# Altium PCB Module.PcbDoc (part 1 of 3)
Units mil, origin at the board's own origin, x right, y up, seen from the top; angles counter-clockwise.
Board outline 59055.12 x 27559.06 mil, 2 copper layers (Top Layer, Bottom Layer); 175 components, 152 nets, 576 pads, 116 vias.
Unrouted connection lines stored in the file: 153.
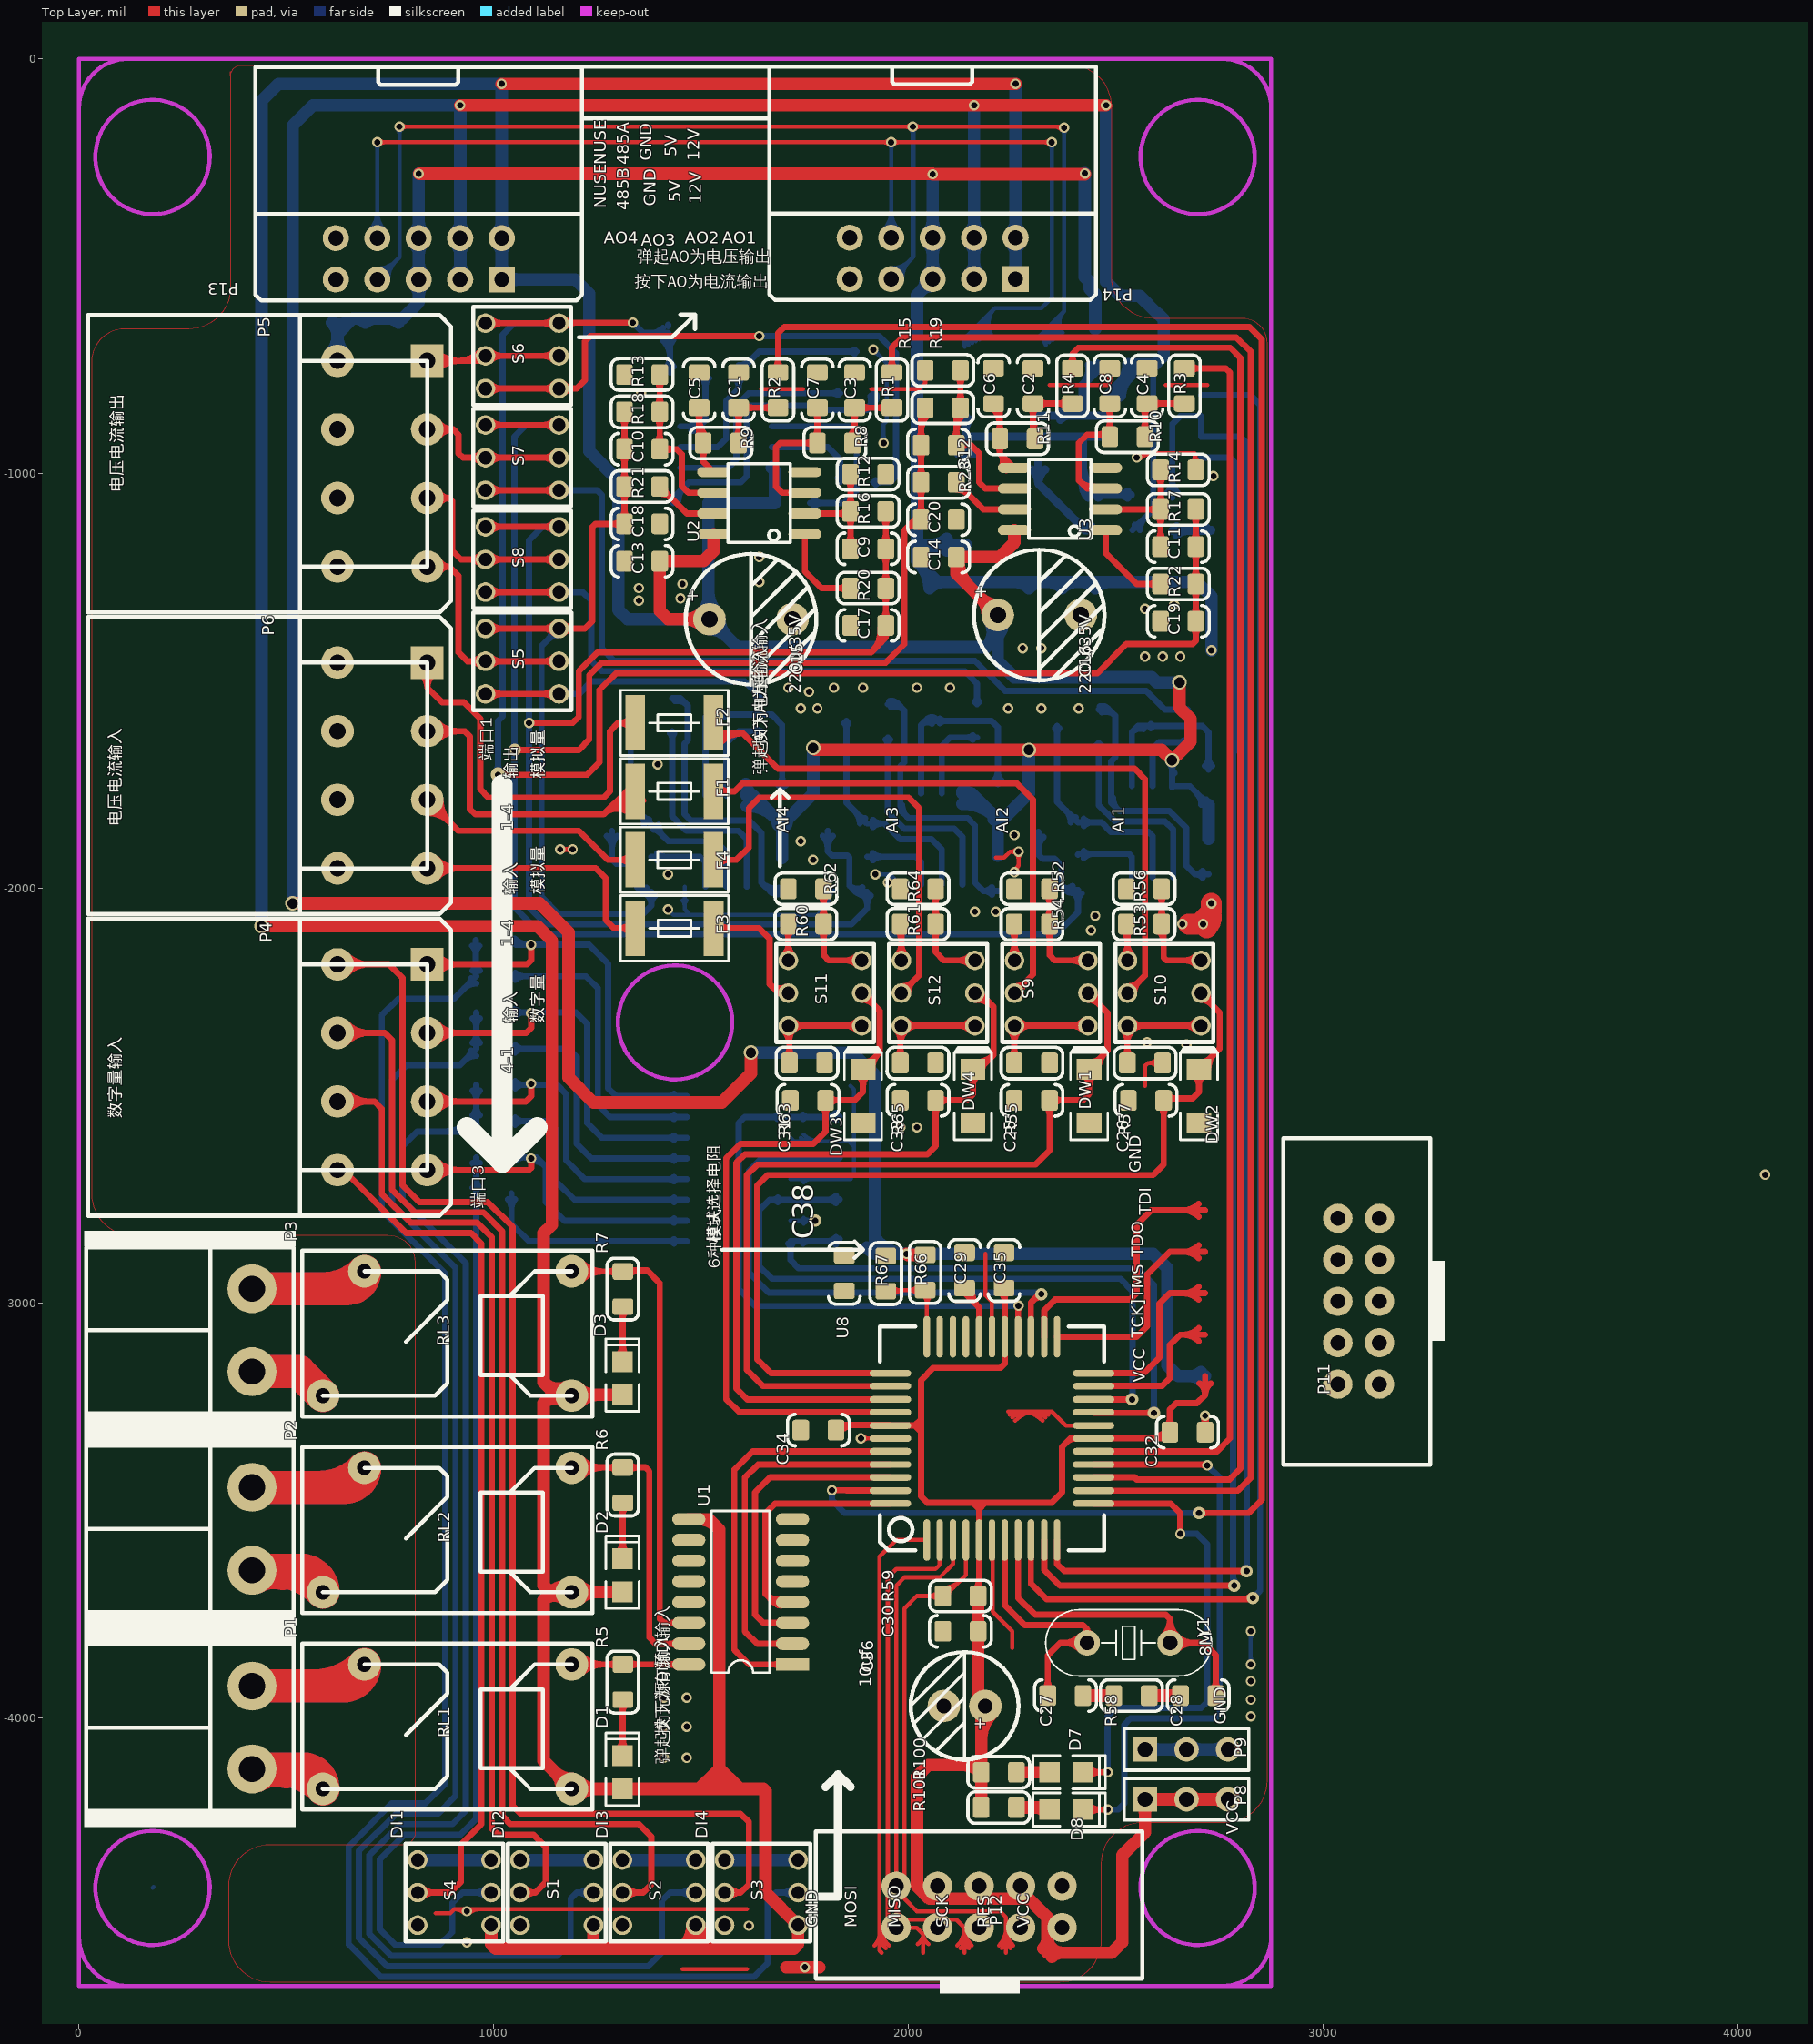
[diagram p0: Top Layer view]
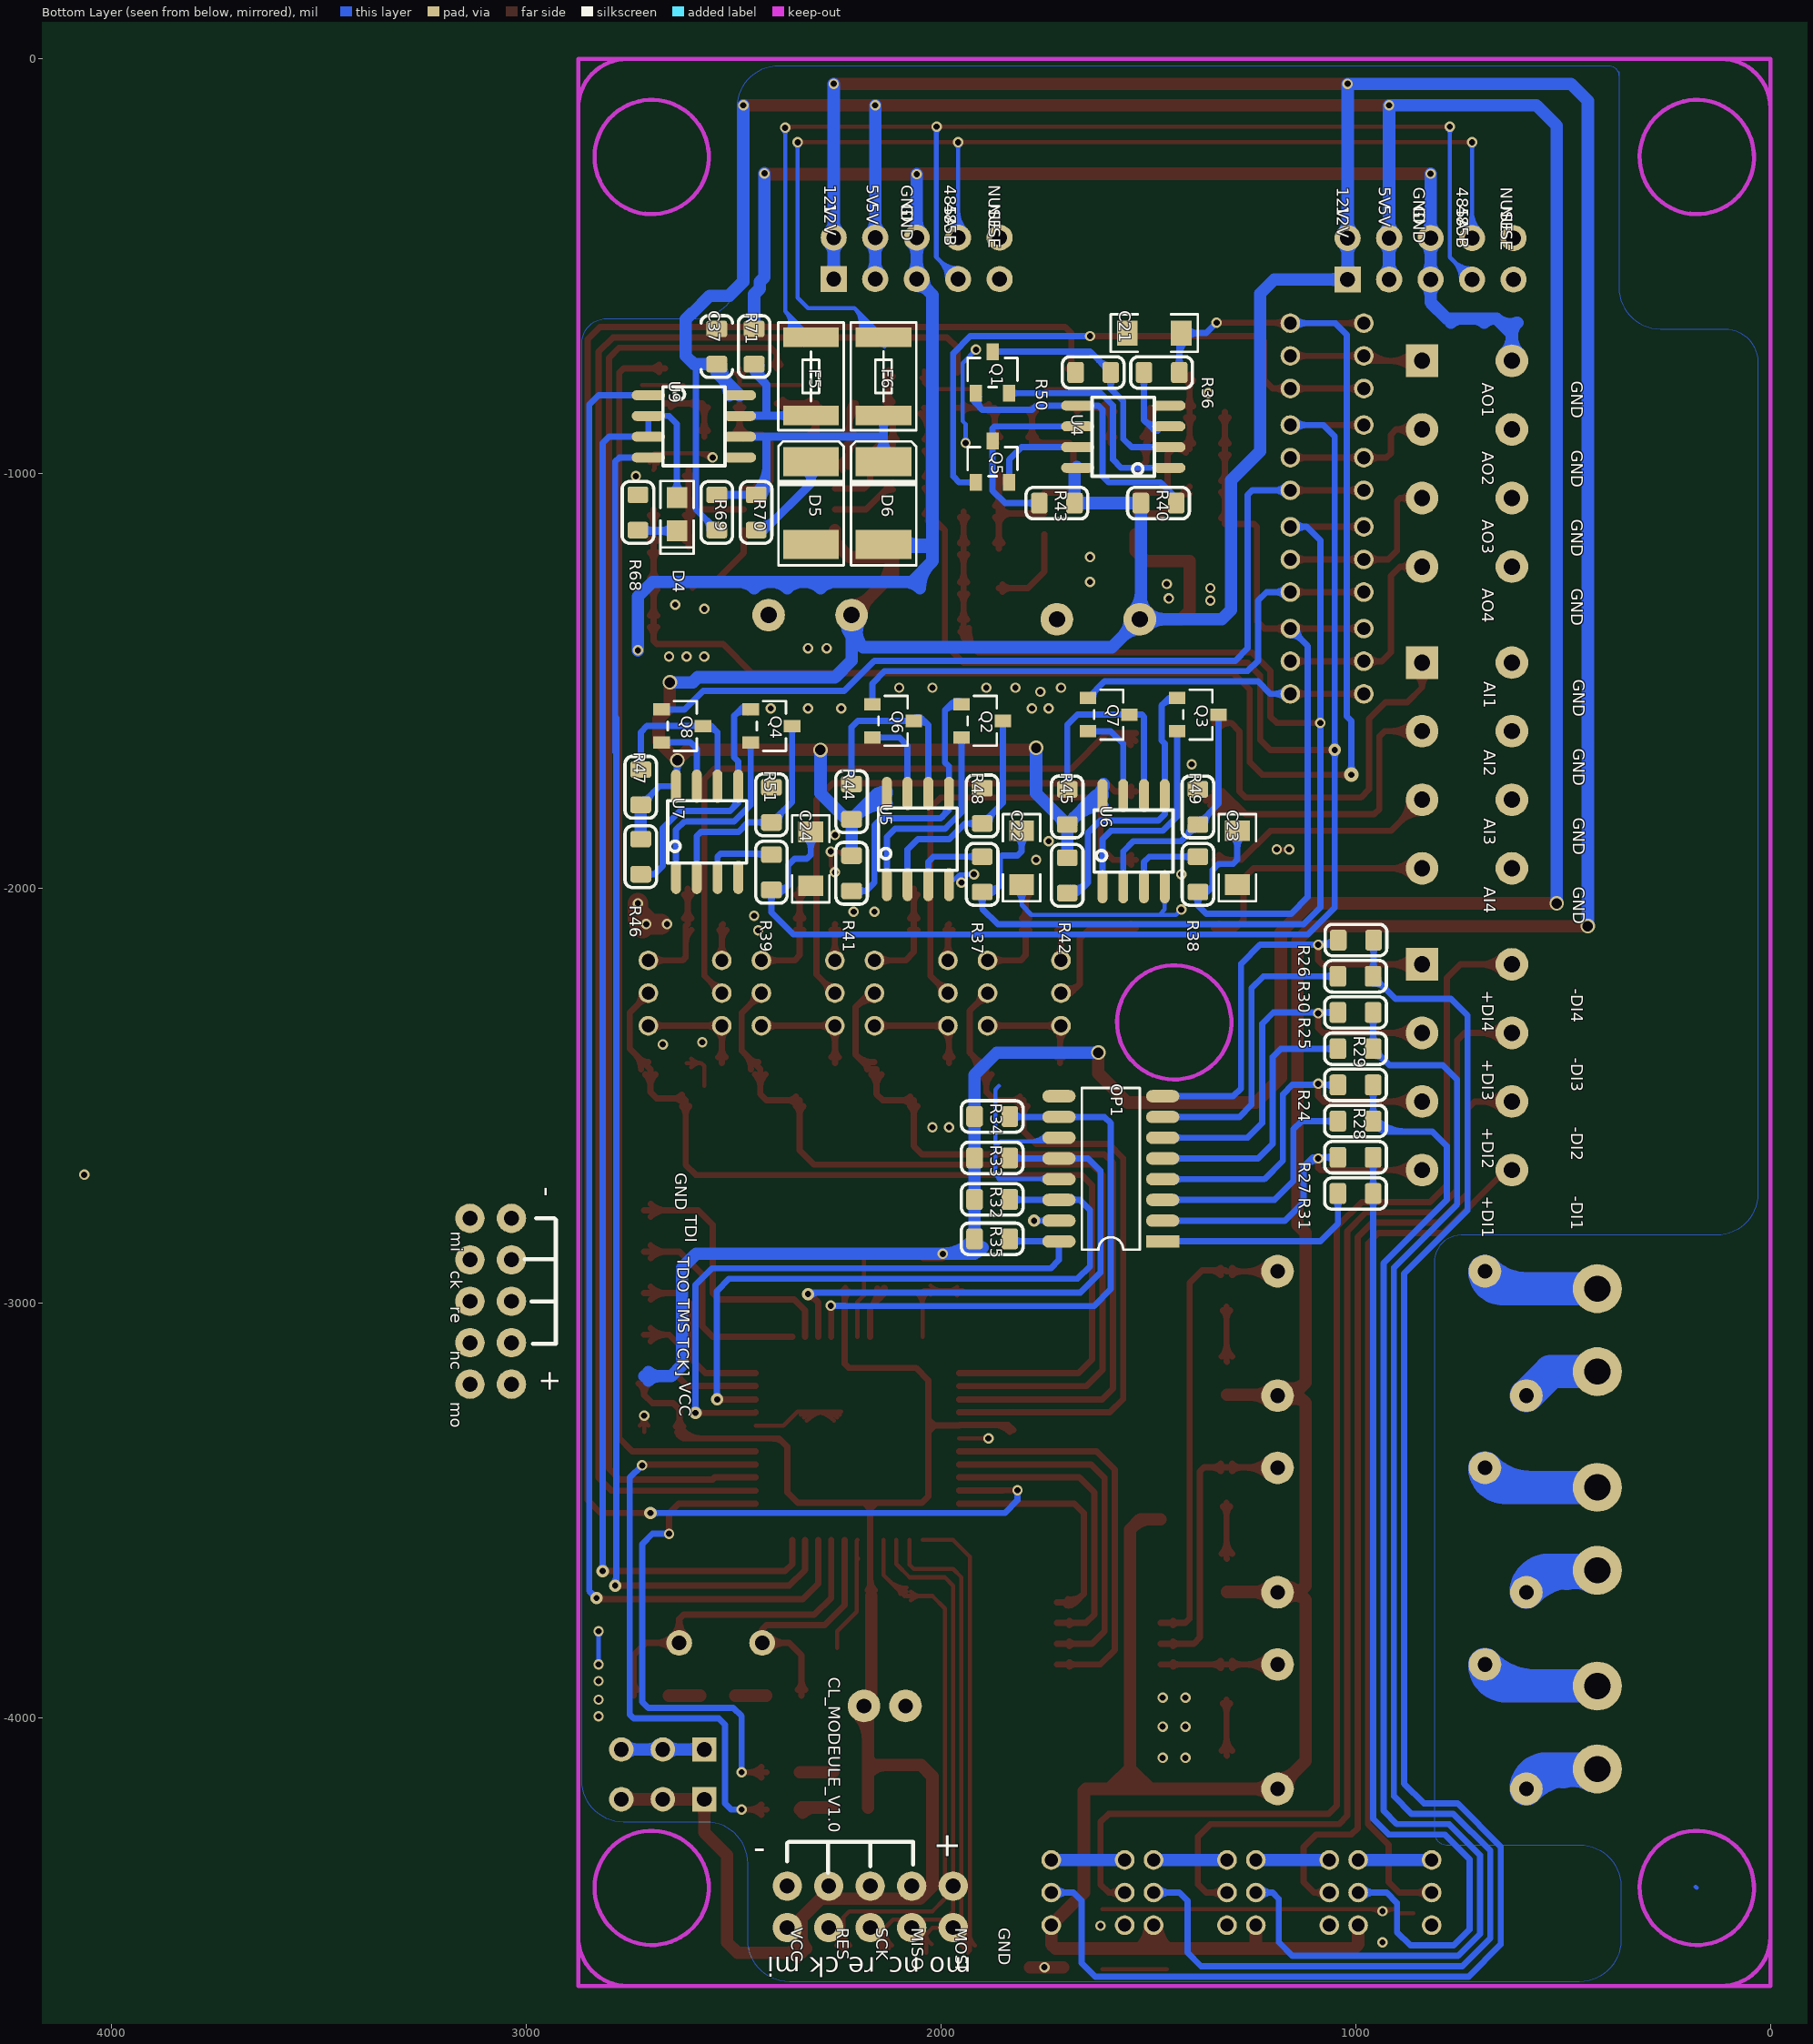
[diagram p1: Bottom Layer view, seen from below]
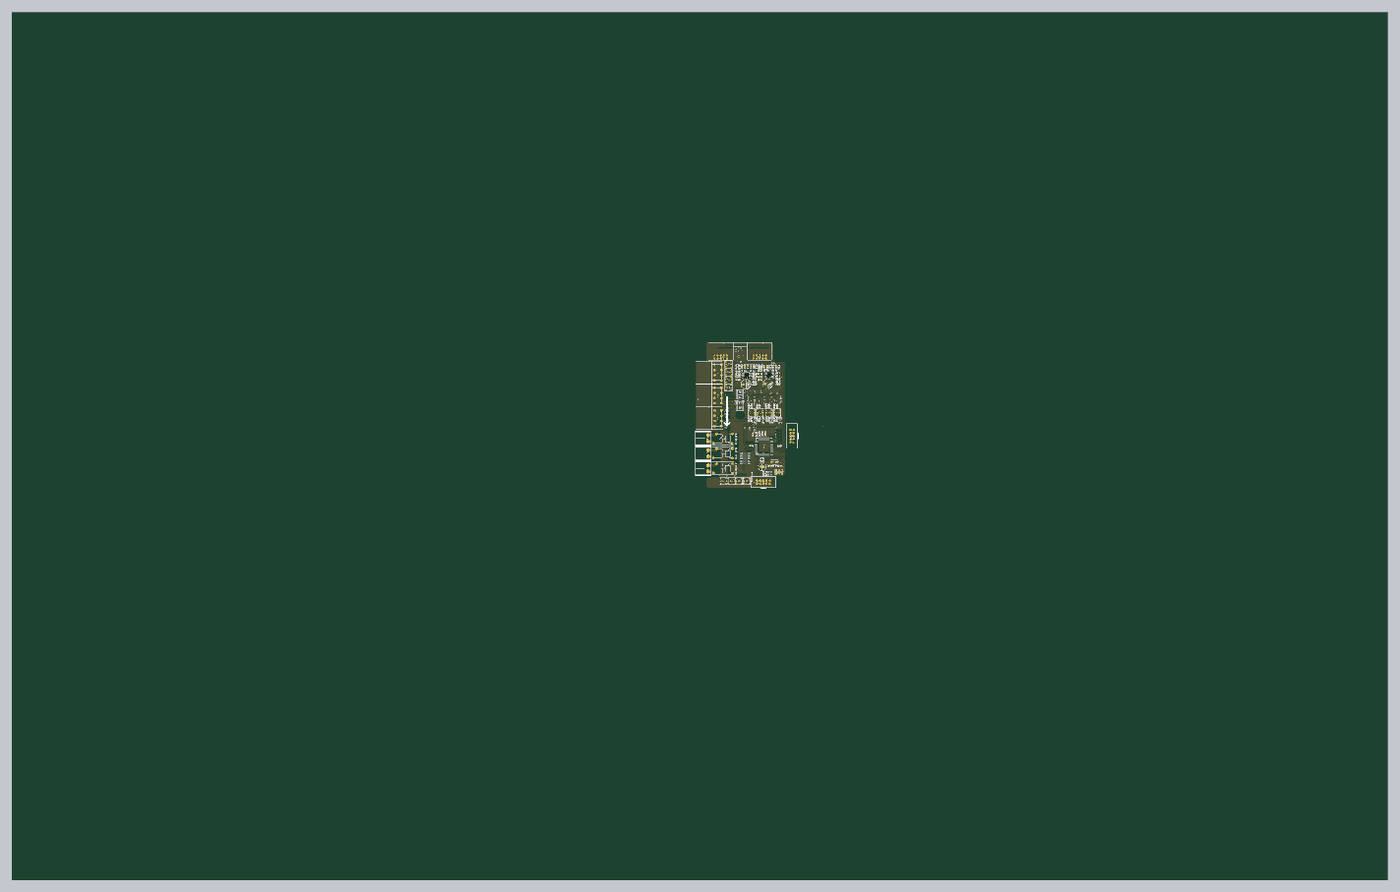
[diagram p4: 3D render of the assembled board from above, using the file's embedded part models]
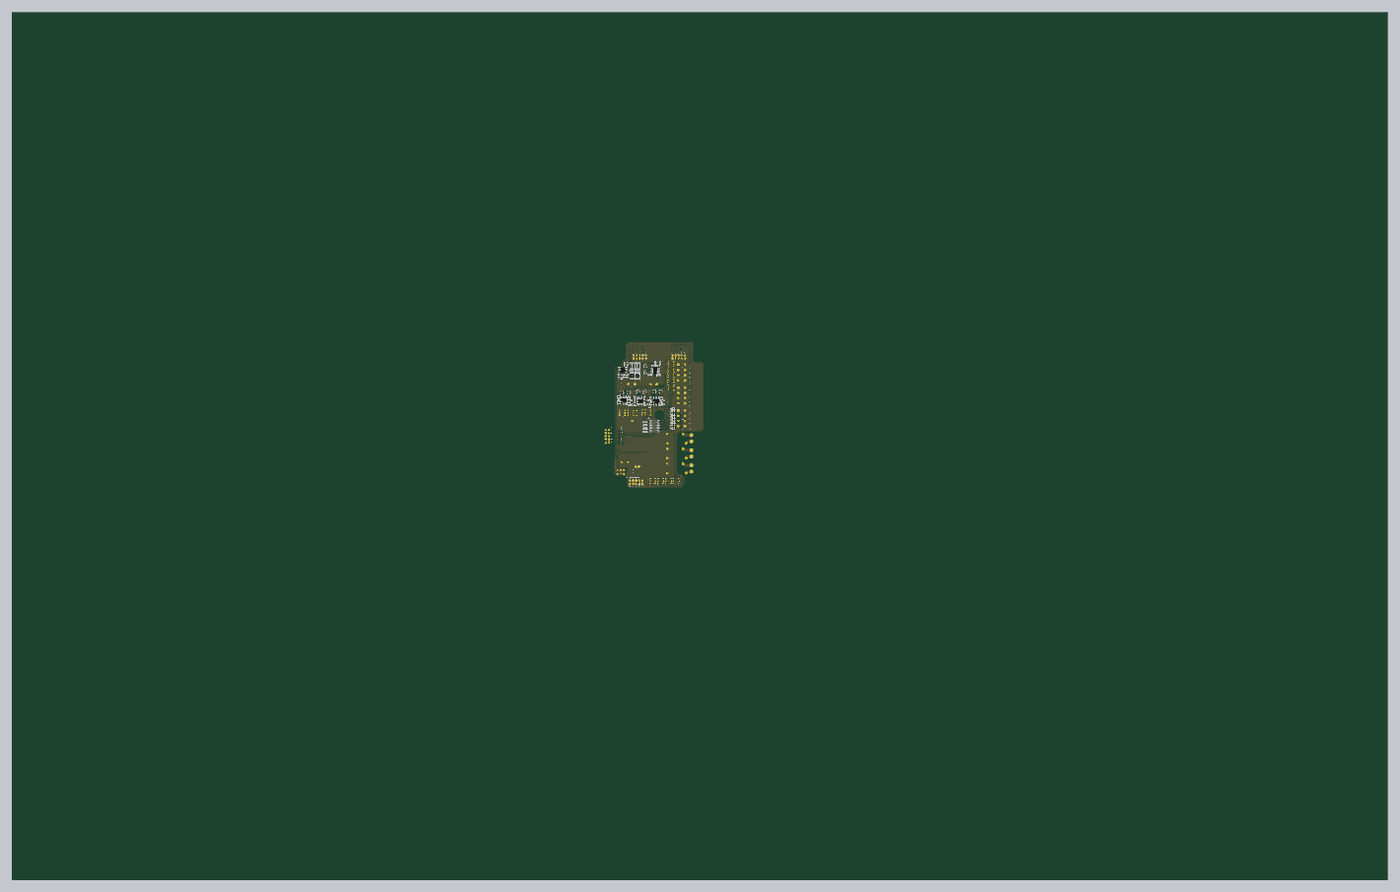
[diagram p5: 3D render of the assembled board from below, using the file's embedded part models]

## Layer stack, top to bottom
Top Solder: solder mask 0.4, Solder Resist, Dk 3.5
Top Layer: signal copper 1.4
Dielectric 1: dielectric 12.6, FR-4, Dk 4.8
Bottom Layer: signal copper 1.4
Bottom Solder: solder mask 0.4, Solder Resist, Dk 3.5

## Board outline
-21689.92,-17096.61 -21689.92,10462.44 37365.2,10462.44 37365.2,-17096.61

## Design rules (kind name [scope] priority, off if disabled: settings)
Clearance Clearance_1 [All] p1: gap=10
Clearance [All] p2: gap=20
ComponentClearance [All] p1 off: gap=10 collisioncheckmode=3 verticalgap=10 showdistances=FALSE
Height [All] p1 off: minheight=0 maxheight=1000 prefheight=500
MinimumSolderMaskSliver [All] p1 off: minsoldermaskwidth=10
PolygonConnect PolygonConnect_1 [IsVia] p1: connectstyle=Direct reliefconductorwidth=10 reliefentries=4 polygonreliefangle="90 Angle" airgapwidth=10
PolygonConnect [All] p2: connectstyle=Relief reliefconductorwidth=10 reliefentries=4 polygonreliefangle="90 Angle" airgapwidth=10
RoomDefinition Module [InComponentClass('Module')] p1 off: confinementstyle=ConfineIn formatcopy=TRUE lockcomponents=FALSE outline 460,-5395.67 -355,-5395.67 -355,-5885.67 460,-5885.67
RoutingVias [All] p1: holewidth=28 width=50 viastyle="Through Hole" minholewidth=28 minwidth=50 maxholewidth=28 maxwidth=50
SilkToBoardRegionClearance [All] p1 off:
SilkToSilkClearance [All] p1 off: silktosilkclearance=10
SilkToSolderMaskClearance [IsPad] p1 off: minsilkscreentomaskgap=10 clearancetoexposedcopper=TRUE
SolderMaskExpansion [All] p1: expansion=4
Width [All] p1: maxlimit=100 minlimit=10 preferedwidth=15 minimp=50.000000 maximp=50.000000 favimp=50.000000
23 further rules are at their usual default settings.

## Components (designator, comment, footprint, x,y, rotation, side; value= is the part's Value field where it differs from the comment)
C1 "105" C0805C 1590,-798.17 r90 top
C2 "105" C0805C 2300,-788.17 r90 top
C3 "105" C0805C 1870,-798.17 r270 top
C4 "105" C0805C 2575,-788.17 r270 top
C5 "105" C0805C 1495,-798.17 r90 top
C6 "105" C0805C 2205,-788.17 r90 top
C7 "105" C0805C 1780,-798.17 r270 top
C8 "105" C0805C 2485,-788.17 r270 top
C9 "104" C0805C 1902.5,-1180.67 r0 top
C10 "104" C0805C 1357.5,-940.67 r180 top
C11 "104" C0805C 2650.1,-1175.67 r0 top
C12 "104" C0805C 2072.5,-930.67 r180 top
C13 "104" C0805C 1357.5,-1210.67 r0 top
C14 "104" C0805C 2072.5,-1200.67 r0 top
C15 "220u/35V" E8MM 1620,-1350.67 r0 top
C16 "220u/35V" E8MM 2315,-1340.67 r0 top
C17 "105" C0805C 1902.5,-1365.67 r180 top
C18 "105" C0805C 1357.5,-1120.67 r0 top
C19 "105" C0805C 2650.1,-1355.67 r180 top
C20 "105" C0805C 2072.5,-1110.67 r0 top
C21 "10u/16V" 1206 1485,-660.67 r0 bottom
C22 "10u/16V" 1206 1805,-1925.67 r270 bottom
C23 "10u/16V" 1206 1285,-1925.67 r270 bottom
C24 "10u/16V" 1206 2313.21,-1928.17 r270 bottom
C25 "104" C0805C 2297.5,-2510.67 r180 top
C26 "104" C0805C 2572.5,-2510.67 r180 top
C27 "22p" C0805C 2378,-3945.67 r0 top
C28 "22p" C0805C 2698,-3945.76 r180 top
C29 "104" C0805C 2135,-2920.67 r270 top
C30 "104" C0805C 2125,-3790.67 r0 top
C31 "104" C0805C 1757.5,-2510.67 r180 top
C32 "104" C0805C 2672.5,-3310.67 r180 top
C33 "104" C0805C 2022.5,-2510.67 r180 top
C34 "104" C0805C 1782.5,-3305.67 r0 top
C35 "104" C0805C 2230,-2920.67 r90 top
C36 "10uf" E6.5MM 2185,-3970.67 r180 top
C37 "104" C0805C 2540,-693.17 r90 bottom
C38 "104" C0805C 1845,-2927.5 r90 top
D1 "LED0" LED0805 1310,-4170.67 r270 top
D2 "LED0" LED0805 1310,-3695.67 r270 top
D3 "LED0" LED0805 1310,-3220.67 r270 top
D4 "LED" LED0805 2636,-1057.56 r90 bottom
D5 "SMBJ6.8" SMBJ_SMT 2312.9,-1070.67 r90 bottom
D6 "SMBJ6.8" SMBJ_SMT 2137.9,-1070.67 r90 bottom
D7 "LED" LED0805 2340,-4130.67 r180 top
D8 "LED" LED0805 2340,-4220.67 r180 top
DW1 "5.1V" 1206AK 2435,-2500.67 r90 top
DW2 "5.1V" 1206AK 2700,-2500.67 r90 top
DW3 "5.1V" 1206AK 1890,-2500.67 r90 top
DW4 "5.1V" 1206AK 2155,-2500.67 r90 top
F1 "X14" PPTC_SMT 1435,-1765.67 r0 top
F2 "X14" PPTC_SMT 1435,-1600.67 r0 top
F3 "X14" PPTC_SMT 1435.51,-2095.67 r0 top
F4 "X14" PPTC_SMT 1435,-1930.67 r0 top
F5 "X14" PPTC_SMT 2312.9,-765.11 r270 bottom
F6 "X14" PPTC_SMT 2137.9,-765.11 r270 bottom
OP1 "PS2512-4" SO_16 1590,-2675.67 r90 bottom
P1 "DO" PL2Q 417,-4022.67 r270 top locked
P2 "DO" PL2Q 417,-3543.67 r270 top locked
P3 "DO" PL2Q 417,-3064.67 r270 top locked
P4 "DI输入" "8P _COM" 731.27,-2430.64 r270 top locked
P5 "电压电流转换" "8P _COM" 731.27,-975.7 r270 top locked
P6 "AI输入" "8P _COM" 731.27,-1703.17 r270 top locked
P8 "GND" HDR1X3 2570,-4195.67 r0 top
P9 "VCC" HDR1X3 2570,-4075.67 r0 top
P11 "JTAG" FC10 3085,-2995 r270 top
P12 "ISP" FC10 2170,-4455 r180 top
P13 "Header 10H" FC10P_WAN 819,-481.67 r180 top locked
P14 "Header 10H" FC10P_WAN 2058,-480.67 r180 top
Q1 "NPN" SOT_23 1875,-755.67 r180 bottom
Q2 "NPN" SOT_23 1900,-1595.67 r270 bottom
Q3 "NPN" SOT_23 1380,-1580.67 r270 bottom
Q4 "NPN" SOT_23 2408.21,-1608.17 r270 bottom
Q5 "PNP" SOT_23 1875,-970.67 r180 bottom
Q6 "PNP" SOT_23 2115,-1595.67 r270 bottom
Q7 "PNP" SOT_23 1595,-1580.67 r270 bottom
Q8 "PNP" SOT_23 2623.21,-1608.17 r270 bottom
R1 "100K" 0805R 1960,-798.17 r90 top
R2 "100K" 0805R 1685,-798.17 r90 top
R3 "100K" 0805R 2665,-788.17 r90 top
R4 "100K" 0805R 2395,-788.17 r90 top
R5 "1K" 0805R 1311,-3913.17 r90 top
R6 "1K" 0805R 1311,-3438.17 r90 top
R7 "1K" 0805R 1311,-2965.67 r90 top
R8 "100K" 0805R 1822.5,-925.67 r0 top
R9 "100K" 0805R 1547.5,-925.67 r0 top
R10 "100K" 0805R 2527.5,-910.67 r0 top
R11 "100K" 0805R 2262.5,-915.67 r0 top
R12 "10K" 0805R 1902.5,-1000.67 r0 top
R13 "10K" 0805R 1357.5,-760.67 r180 top
R14 "10K" 0805R 2650.1,-990.67 r0 top
R15 "10K" 0805R 2082.5,-750.67 r180 top
R16 "10K" 0805R 1902.5,-1090.67 r180 top
R17 "10K" 0805R 2650,-1085.67 r180 top
R18 "10K" 0805R 1357.5,-850.67 r0 top
R19 "10K" 0805R 2082.5,-840.67 r0 top
R20 "100R" 0805R 1902.5,-1275.67 r180 top
R21 "100R" 0805R 1357.5,-1030.67 r0 top
R22 "100R" 0805R 2650,-1265.67 r180 top
R23 "100R" 0805R 2072.5,-1020.67 r0 top
R24 "10K" 0805R 1000,-2473.38 r0 bottom
R25 "10K" 0805R 1000,-2298.81 r0 bottom
R26 "10K" 0805R 999,-2124.24 r0 bottom
R27 "10K" 0805R 1000,-2647.96 r0 bottom
R28 "10K" 0805R 1000,-2560.67 r0 bottom
R29 "10K" 0805R 1000,-2386.1 r0 bottom
R30 "10K" 0805R 1000,-2211.52 r0 bottom
R31 "10K" 0805R 1000,-2735.24 r0 bottom
R32 "10K" 0805R 1876.04,-2749.58 r0 bottom
R33 "10K" 0805R 1876.04,-2649.58 r0 bottom
R34 "10K" 0805R 1876.04,-2549.58 r0 bottom
R35 "10K" 0805R 1876.04,-2844.58 r0 bottom
R36 "200k" 0805R 1467.5,-755.67 r180 bottom
R37 "200k" 0805R 1900,-1965.67 r270 bottom
R38 "200k" 0805R 1380,-1965.67 r270 bottom
R39 "200k" 0805R 2408.21,-1960.67 r270 bottom
R40 "1.5K" 0805R 1475,-1070.67 r0 bottom
R41 "1.5K" 0805R 2215,-1963.17 r90 bottom
R42 "1.5K" 0805R 1695,-1968.17 r90 bottom
R43 "150R" 0805R 1720,-1070.67 r180 bottom
R44 "150R" 0805R 2215,-1790.67 r270 bottom
R45 "150R" 0805R 1695,-1803.17 r270 bottom
R46 "1.5K" 0805R 2723.21,-1923.17 r90 bottom
R47 "150R" 0805R 2723.21,-1755.67 r270 bottom
R48 "1K" 0805R 1900,-1800.67 r270 bottom
R49 "1K" 0805R 1380,-1803.17 r270 bottom
R50 "1K" 0805R 1632.5,-755.67 r180 bottom
R51 "1K" 0805R 2408.21,-1798.17 r270 bottom
R52 "10K" 0805R 2297.5,-2085.67 r0 top
R53 "10K" 0805R 2567.5,-2085.67 r0 top
R54 "10K" 0805R 2297.5,-2000.67 r180 top
R55 "250R" 0805R 2297.5,-2420.67 r0 top
R56 "10K" 0805R 2567.5,-2000.67 r180 top
R57 "250R" 0805R 2570,-2420.67 r0 top
R58 "1M" 0805R 2537.5,-3945.67 r0 top
R59 "10K" 0805R 2125,-3705.67 r0 top
R60 "10K" 0805R 1752.5,-2085.67 r0 top
R61 "10K" 0805R 2022.5,-2085.67 r0 top
R62 "10K" 0805R 1752.5,-2000.67 r180 top
R63 "250R" 0805R 1755,-2420.67 r0 top
R64 "10K" 0805R 2022.5,-2000.67 r180 top
R65 "250R" 0805R 2022.5,-2420.67 r0 top
R66 "10K" 0805R 2040,-2925.67 r90 top
R67 "???" 0805R 1945,-2928.17 r270 top
R68 "1K" 0805R 2730,-1093.17 r270 bottom
R69 "3K" 0805R 2540,-1093.17 r270 bottom
R70 "120R?" 0805R 2445,-1093.17 r270 bottom
R71 "3K" 0805R 2450,-693.17 r270 bottom
R100 "1K" 0805R 2217.5,-4130.67 r0 top
R101 "1K" 0805R 2217.5,-4215.67 r0 top
RL1 "" HF32A4 888,-4020.67 r180 top locked
RL2 "" HF32A4 888,-3546.67 r180 top locked
RL3 "" HF32A4 888,-3072.67 r180 top locked
S1 "SW-DPDT" BUTTON 1151.67,-4420.67 r0 top
S2 "SW-DPDT" BUTTON 1398.33,-4420.67 r0 top
S3 "SW-DPDT" BUTTON 1645,-4420.67 r0 top
S4 "SW-DPDT" BUTTON 905,-4420.67 r0 top
S5 "SW-DPDT" BUTTON 1068.58,-1451.93 r180 top
S6 "SW-DPDT" BUTTON 1068.58,-715.67 r180 top
S7 "SW-DPDT" BUTTON 1068.58,-961.09 r180 top
S8 "SW-DPDT" BUTTON 1068.58,-1206.51 r180 top
S9 "SW-DPDT" button 2343.81,-2251.93 r0 top
S10 "SW-DPDT" BUTTON 2616.42,-2251.93 r0 top
S11 "SW-DPDT" BUTTON 1798.58,-2251.93 r0 top
S12 "SW-DPDT" BUTTON 2071.19,-2251.93 r0 top
U1 "2003" SO_16 1595,-3695.67 r90 top
U2 "LM358" SOP-08 1640,-1070.67 r90 top
U3 "LM358" SOP-08 2365,-1060.67 r90 top
U4 "LM358" SOP-08 1560,-910.67 r90 bottom
U5 "LM358" SOP-08 2055,-1880.67 r180 bottom
U6 "LM358" SOP-08 1535,-1885.67 r180 bottom
U7 "LM358" SOP-08 2563.21,-1863.17 r180 bottom
U8 "Atmega16" QFP44 2201,-3325.67 r90 top
U9 "U485" SOP8 2595,-885.67 r270 bottom
Y1 "8M" XTAL-M 2630.5,-3818.67 r180 top

## Footprints (in the part's own frame and the unit in brackets; to place one, negate y for a bottom-side part, rotate by r counter-clockwise, add the part's x,y. Pads: shape width x height; smd on the part's side, far side on the other; paste and mask are expansions set on the pad)
"8P _COM" [mm]
  rect 2x2 hole 1: 1(-6.3,2.75)
  round 2 hole 1: 2(-6.3,-2.75) 3(-2.1,2.75) 4(-2.1,-2.75) 5(2.1,2.75) 6(2.1,-2.75) 7(6.3,2.75) 8(6.3,-2.75)
  silkscreen extent -9.1,-18.04 9.1,4.2
0805R [mil]
  rrect30% 40x50 smd: 1(-42.5,0) 2(42.5,0)
  silkscreen extent -75,-38 75,38, body extent -39,-25 40,25, height 30
1206 [mil]
  rect 50x60 smd: 1(-65,0) 2(65,0)
  silkscreen extent -105,-45 105,45
1206AK [mil]
  rect 50x60 smd: A(-65,0) K(65,0)
  silkscreen extent -105,-45 118,45
BUTTON [mm]
  round 1.2 hole 0.8: 1(-2.25,0) 2(-2.25,2) 3(-2.25,-2) 4(2.25,0) 5(2.25,2) 6(2.25,-2)
  silkscreen extent -3,-3 3,3
button [mm]
  round 1.2 hole 0.8: 1(-2.25,0) 2(-2.25,2) 3(-2.25,-2) 4(2.25,0) 5(2.25,2) 6(2.25,-2)
  silkscreen extent -3,-3 3,3
C0805C [mil]
  rrect30% 40x50 smd: 1(-42.5,0) 2(42.5,0)
  silkscreen extent -75,-38 75,38, body extent -39,-25 39,25, height 30
E6.5MM [mm]
  round 2 hole 0.9: 1(0,0) 2(2.54,0)
  silkscreen extent -2.03,-3.3 4.57,3.3
E8MM [mm]
  round 2 hole 1: 1(-2.54,0) 2(2.54,0)
  silkscreen extent -4,-4 4,4, body extent -4.01,-4.04 4.01,3.99, height 7
FC10 [mm]
  round 1.8 hole 0.914: 1(5.08,1.27) 2(5.08,-1.27) 3(2.54,1.27) 4(2.54,-1.27) 5(0,1.27) 6(0,-1.27) 7(-2.54,1.27) 8(-2.54,-1.27) 9(-5.08,1.27) 10(-5.08,-1.27)
  silkscreen extent -10,-4.61 10,5.32
FC10P_WAN [mm]
  rect 1.6x1.6 hole 0.914: 1(-5.08,1.27)
  round 1.6 hole 0.914: 2(-5.08,-1.27) 3(-2.54,1.27) 4(-2.54,-1.27) 5(0,1.27) 6(0,-1.27) 7(2.54,1.27) 8(2.54,-1.27) 9(5.08,1.27) 10(5.08,-1.27)
  silkscreen extent -10,-11.75 10,2.55
HDR1X3 [mm] "Connector; Header; 3 Position"
  rect 1.5x1.5 hole 0.9: 1(0,0)
  round 1.5 hole 0.9: 2(2.54,0) 3(5.08,0)
  silkscreen extent -1.27,-1.27 6.35,1.27
HF32A4 [mm]
  round 2 hole 0.9: 1(-7.62,3.81) 2(-7.62,-3.81) 3(7.62,3.81) 4(5.08,-3.81)
  silkscreen extent -8.89,-5.08 8.89,5.08
LED0805 [mil]
  rect 50x50 smd: 1(0,0) 2(-80,0)
  silkscreen extent -135,-40 40,40
PL2Q [mm]
  round 3 hole 1.6: 1(-2.54,0) 2(2.54,0)
  silkscreen extent -6.1,-10.29 6.1,2.67
PPTC_SMT [mm]
  rect 1.2x3.4 smd: 1(-2.4,0) 2(2.4,0)
  silkscreen extent -3.3,-2 3.3,2, body extent -2.36,-2.08 2.62,2.08, height 0.5
QFP44 [mil]
  oval 100x16 smd: 1(-245,157) 2(-245,126) 3(-245,94) 4(-245,63) 5(-245,31) 6(-245,0) 7(-245,-31) 8(-245,-63) 9(-245,-94) 10(-245,-126) 11(-245,-157) 23(245,-157) 24(245,-126) 25(245,-94) 26(245,-63) 27(245,-31) 28(245,0) 29(245,31) 30(245,63) 31(245,94) 32(245,126) 33(245,157)
  oval 16x100 smd: 12(-157,-245) 13(-126,-245) 14(-94,-245) 15(-63,-245) 16(-31,-245) 17(0,-245) 18(31,-245) 19(63,-245) 20(94,-245) 21(126,-245) 22(157,-245) 34(157,245) 35(126,245) 36(94,245) 37(63,245) 38(31,245) 39(0,245) 40(-31,245) 41(-63,245) 42(-94,245) 43(-126,245) 44(-157,245)
  silkscreen extent -270,-270 270,270
SMBJ_SMT [mil]
  rect 70x133.86 smd: A(-100,0) K(100,0)
  silkscreen extent -150,-79 149,79, body extent -91,-53 91,53, height 94
SO_16 [mil]
  rect 30x80 smd: 1(-175,-125)
  oval 30x80 smd: 2(-125,-125) 3(-75,-125) 4(-25,-125) 5(25,-125) 6(75,-125) 7(125,-125) 8(175,-125) 9(175,125) 10(125,125) 11(75,125) 12(25,125) 13(-25,125) 14(-75,125) 15(-125,125) 16(-175,125)
  silkscreen extent -195,-70 195,70, body extent -194,-115 192,113, height 69
SOP8 [mil]
  oval 24x80 smd: 1(-75,-110) 2(-25,-110) 3(25,-110) 4(75,-110) 5(75,110) 6(25,110) 7(-25,110) 8(-75,110)
  silkscreen extent -95,-75 95,75, body extent -97,-118 96,118, height 61
SOP-08 [mil]
  oval 24x80 smd: 1(-75,-110) 2(-25,-110) 3(25,-110) 4(75,-110) 5(75,110) 6(25,110) 7(-25,110) 8(-75,110)
  silkscreen extent -95,-75 95,75, body extent -97,-118 96,118, height 61
SOT_23 [mil]
  rect 30x40 smd: 1(-40,-50) 2(40,-50) 3(0,50)
  silkscreen extent -60,-35 60,35
XTAL-M [mil]
  round 62 hole 35.43: 1(0,0) 2(200,0)
  silkscreen extent -100,-80 300,80

## Part data
C1 C2 C5 C6 C9 C10 C11 C12 C13 C14 C17 C18 C19 C20 C21 C22 C23 C24 C25 C26 C31 C33 C37 C38: library part CAP, "Capacitor"
C3 C4 C7 C8 C27 C28 C29 C30 C32 C34 C35: library part Cap, "Capacitor"
C15 C16: library part ELECTRO1, "Electrolytic Capacitor"
C36: library part "Cap Pol1", "Polarized Capacitor (Radial)"
D1 D2 D3: "Typical INFRARED GaAs LED"
D5 D6 DW1 DW2 DW3 DW4: library part DIODE, "Diode"
F1 F2 F3 F4 F5 F6: library part "Fuse 1", "Fuse"
P1 P2 P3: library part "Header 2", "Header, 2-Pin"
P4 P5 P6: library part "Header 8", "Header, 8-Pin"
P8 P9: library part "Header 3", "Header, 3-Pin"
P11 P12: library part "Header 10H", "Header, 10-Pin, Right Angle"
P13 P14: "Header, 10-Pin, Right Angle"
Q1 Q2 Q3 Q4: "NPN Bipolar Transistor"
Q5 Q6 Q7 Q8: "PNP Bipolar Transistor"
R1 R2 R3 R4 R5 R6 R7 R8 R9 R10 R11 R12 R13 R14 R15 R16 R17 R18 R19 R20 R21 R22 R23 R24 R25 R26 R27 R28 R29 R30 R31 R36 R37 R38 R39 R40 R41 R42 R43 R44 R45 R46 R47 R48 R49 R50 R51 R52 R53 R54 R55 R56 R57 R58 R59 R60 R61 R62 R63 R64 R65 R66 R67 R69 R70 R71 R100 R101: library part Res2, "Resistor"
R32 R33 R34 R35 R68: library part res
RL1 RL2 RL3: library part RELAY
S1 S2 S3 S4 S5 S6 S7 S8 S9 S10 S11 S12: "Double-Pole, Double-Throw Switch"
U1: library part ULN2003A, "High-Voltage, High-Current Darlington Array"
Y1: library part XTAL, "Crystal Oscillator"

## Via types
v1: diameter 25, hole 15, Top Layer to Bottom Layer, tented both sides, 99 vias
v2: diameter 30, hole 15, Top Layer to Bottom Layer, tented both sides, 9 vias
v3: diameter 35, hole 25, Top Layer to Bottom Layer, tented both sides, 7 vias
v4: diameter 35, hole 15, Top Layer to Bottom Layer, tented both sides, 1 vias

## Nets (pads, with @x,y where several pads share a name; then routed paths per layer and width w, separated by ;. In a path a pad name is that pad's centre, name@x,y a point inside that pad or via, vN(x,y) a via of type N, cw(c..) or ccw(c..) an arc to the next point about the centre after c; other vN are vias at no path point)
0~10V(1): C11.2 C19.1 C21.1 R17.1 R22.1 R36.2 S6.3 S6.6 | length 4836
  Top Layer w15: S6.6@980,-636.93 S6.3@1157.16,-636.93 1158.42,-635.67 v1(1335,-635.67) ; S6.6@991.4,-648.33 cw(c1018.92,-675.85) 1018.92,-636.93 cw(c1018.92,-598.01) S6.6@991.4,-625.53 ; v4(1010,-1725.67) 1225,-1725.67 1255,-1695.67 1255,-1520.67 1295,-1480.67 2455,-1480.67 2525,-1410.67 2684.9,-1410.67 2692.6,-1402.96 C19.1@2692.6,-1355.67 2692.5,-1355.57 R22.1@2692.5,-1265.67 2692.6,-1265.57 C11.2@2692.6,-1175.67 2692.5,-1175.57 R17.1@2692.5,-1085.67 ; v4@1017.07,-1732.74 cw(c1034.14,-1749.81) 1034.14,-1725.67 cw(c1034.14,-1701.53) v4@1017.07,-1718.6 ; S6.3@1145.76,-648.33 ccw(c1118.24,-675.85) 1118.24,-636.93 ccw(c1118.24,-598.01) S6.3@1145.76,-625.53 ; S6.3@1168.56,-648.33 cw(c1199.13,-678.89) 1199.13,-635.67 ; S6.3@1168.56,-625.53 ccw(c1193.04,-601.05) 1193.04,-635.67 ; R22.1@2683.66,-1279.51 cw(c2662.32,-1300.85) 2692.5,-1300.85 cw(c2722.68,-1300.85) R22.1@2701.34,-1279.51 ; R22.1@2683.66,-1251.83 ccw(c2662.07,-1230.24) 2692.6,-1230.24 ; R17.1@2683.66,-1099.51 cw(c2662.32,-1120.85) 2692.5,-1120.85 cw(c2722.68,-1120.85) R17.1@2701.34,-1099.51 ; C19.1@2683.77,-1369.51 cw(c2662.43,-1390.85) 2692.6,-1390.85 cw(c2722.78,-1390.85) C19.1@2701.44,-1369.51 ; C19.1@2683.77,-1341.83 ccw(c2662.68,-1320.74) 2692.5,-1320.74 ; C11.2@2683.77,-1189.51 cw(c2662.43,-1210.85) 2692.6,-1210.85 cw(c2722.78,-1210.85) C11.2@2701.44,-1189.51 ; C11.2@2683.77,-1161.83 ccw(c2662.68,-1140.74) 2692.5,-1140.74 ; 2692.5,-1320.24 ccw(c2723.03,-1320.24) C19.1@2701.44,-1341.83 ; 2692.5,-1140.24 ccw(c2723.03,-1140.24) C11.2@2701.44,-1161.83 ; 2692.6,-1230.74 ccw(c2722.43,-1230.74) R22.1@2701.34,-1251.83
  Bottom Layer w15: v4@1002.93,-1718.6 ccw(c985.86,-1701.53) 1010,-1701.53 ccw(c1034.14,-1701.53) v4@1017.07,-1718.6 ; v4(1010,-1725.67) 1010,-1595.67 1021.12,-1584.55 1021.12,-664.55 1048.74,-636.93 S6.3@1157.16,-636.93 ; S6.3@1145.76,-648.33 ccw(c1118.24,-675.85) 1118.24,-636.93 ccw(c1118.24,-598.01) S6.3@1145.76,-625.53 ; v1(1335,-635.67) 1360,-660.67 C21.1@1412.5,-660.67 ; C21.1@1407.63,-678.04 cw(c1365.68,-719.99) 1425,-719.99 ; C21.1@1407.63,-673.04 ccw(c1377.75,-702.92) 1377.75,-660.67 ccw(c1377.75,-618.42) C21.1@1407.63,-648.3 ; R36.2@1416.16,-741.83 ccw(c1394.82,-720.49) 1425,-720.49 ccw(c1455.18,-720.49) R36.2@1433.84,-741.83 ; C21.1@1420,-660.67 C21.1@1412.5,-660.67 ; C21.1@1420,-643.85 C21.1@1420,-640.67 ; R36.2@1425,-755.67 1425,-682.49 1412.5,-669.99 C21.1@1412.5,-660.67 ; 1425,-695.85 cw(c1450.18,-695.85) C21.1@1432.37,-678.04
0~10V(2): C12.2 C20.1 C24.1 R19.1 R23.1 R39.2 S7.3 S7.6 | length 5691.1
  Top Layer w15: S7.6@980,-882.35 S7.3@1157.17,-882.35 ; S7.6@991.4,-893.75 cw(c1018.92,-921.27) 1018.92,-882.35 cw(c1018.92,-843.43) S7.6@991.4,-870.95 ; v2(1050,-1665.67) 1205,-1665.67 1230,-1640.67 1230,-1486.03 1260.36,-1455.67 1945,-1455.67 1990,-1410.67 1990,-1135.67 ; v2@1055.3,-1670.97 cw(c1068.11,-1683.78) 1068.11,-1665.67 cw(c1068.11,-1647.56) v2@1055.3,-1660.37 ; S7.3@1145.77,-893.75 ccw(c1118.24,-921.27) 1118.24,-882.35 ccw(c1118.24,-843.43) S7.3@1145.77,-870.95 ; 2006.89,-1118.78 cw(c2023.21,-1135.1) C20.1@2030.82,-1113.31 ; C20.1@2021.16,-1096.83 ccw(c1999.82,-1075.49) 2030,-1075.49 ccw(c2060.18,-1075.49) C20.1@2038.84,-1096.83 ; R23.1@2021.16,-1034.51 cw(c1999.82,-1055.85) 2030,-1055.85 cw(c2060.18,-1055.85) R23.1@2038.84,-1034.51 ; R23.1@2021.16,-1006.83 ccw(c1999.82,-985.49) 2030,-985.49 ccw(c2060.18,-985.49) R23.1@2038.84,-1006.83 ; C12.2@2021.16,-944.51 cw(c1999.82,-965.85) 2030,-965.85 cw(c2060.18,-965.85) C12.2@2038.84,-944.51 ; C12.2@2021.16,-916.83 ccw(c1999.82,-895.49) 2030,-895.49 ccw(c2060.18,-895.49) C12.2@2038.84,-916.83 ; C20.1@2025.88,-1127.47 ccw(c2014.47,-1160.14) 1990,-1135.67 ; 2030,-899.99 cw(c2094.32,-899.99) R19.1@2048.84,-854.51 ; R19.1@2030,-863.78 cw(c2058.11,-863.78) R19.1@2038.23,-843.9 ; R19.1@2040,-840.67 2030,-850.67 C12.2@2030,-930.67 R23.1@2030,-1020.67 C20.1@2030,-1110.67 2015,-1110.67 1990,-1135.67
  Bottom Layer w15: v2@1044.7,-1670.97 cw(c1031.89,-1683.78) 1050,-1683.78 cw(c1068.11,-1683.78) v2@1055.3,-1670.97 ; v2@1044.7,-1660.37 ccw(c1031.89,-1647.56) 1050,-1647.56 ccw(c1068.11,-1647.56) v2@1055.3,-1660.37 ; S7.3@1145.77,-893.75 ccw(c1118.24,-921.27) 1118.24,-882.35 ccw(c1118.24,-843.43) S7.3@1145.77,-870.95 ; S7.3@1157.17,-882.35 1078.32,-882.35 1050,-910.67 v2(1050,-1665.67) 1050,-2045.67 1115,-2110.67 2355,-2110.67 2408.21,-2057.46 R39.2@2408.21,-2003.17 2378.21,-2003.17 ; C24.1@2300.84,-1875.54 cw(c2270.96,-1905.42) 2313.21,-1905.42 cw(c2355.46,-1905.42) C24.1@2325.59,-1875.54 ; C24.1@2313.21,-1863.17 2313.21,-1918.17 2323.21,-1928.17 2351.98,-1928.17 2368.21,-1944.4 2368.21,-1993.17 ; 2379.4,-2004.35 ccw(c2392.5,-1991.25) R39.2@2404.88,-2005.03 ; R39.2@2393.21,-2010.67 ccw(c2378.21,-2021.92) 2378.21,-2003.17 ; R39.2@2393.21,-1995.67 cw(c2378.21,-1984.42) 2378.21,-2003.17 ; R39.2@2394.85,-1993.88 cw(c2381.9,-1979.48) 2368.21,-1993.17 ; R39.2@2399.37,-2012.01 cw(c2378.03,-2033.35) 2408.21,-2033.35 cw(c2438.39,-2033.35) R39.2@2417.05,-2012.01 ; 2368.21,-1993.17 2378.21,-2003.17
0~10V(3): C9.2 C17.1 C22.1 R16.1 R20.1 R37.2 S8.3 S8.6 | length 4385.4
  Top Layer w15: S8.6@980,-1127.77 S8.3@1157.17,-1127.77 ; S8.6@991.4,-1139.17 cw(c1018.92,-1166.69) 1018.92,-1127.77 cw(c1018.92,-1088.85) S8.6@991.4,-1116.37 ; v1(1085,-1600.67) 1190,-1600.67 1205,-1585.67 1205,-1475.67 1250,-1430.67 1910,-1430.67 ; S8.3@1145.77,-1139.17 ccw(c1118.24,-1166.69) 1118.24,-1127.77 ccw(c1118.24,-1088.85) S8.3@1145.77,-1116.37 ; C17.1@1932.52,-1371.41 cw(c1855.31,-1375.97) 1910,-1430.67 ; 1933.61,-1407.06 ccw(c1899.89,-1373.34) C17.1@1947.5,-1370.52 ; C17.1@1936.16,-1351.83 ccw(c1914.82,-1330.49) 1945,-1330.49 ccw(c1975.18,-1330.49) C17.1@1953.84,-1351.83 ; R20.1@1936.16,-1289.51 cw(c1914.82,-1310.85) 1945,-1310.85 cw(c1975.18,-1310.85) R20.1@1953.84,-1289.51 ; R20.1@1936.16,-1261.83 ccw(c1914.82,-1240.49) 1945,-1240.49 ccw(c1975.18,-1240.49) R20.1@1953.84,-1261.83 ; C9.2@1936.16,-1194.51 cw(c1914.82,-1215.85) 1945,-1215.85 cw(c1975.18,-1215.85) C9.2@1953.84,-1194.51 ; C9.2@1936.16,-1166.83 ccw(c1914.82,-1145.49) 1945,-1145.49 ccw(c1975.18,-1145.49) C9.2@1953.84,-1166.83 ; R16.1@1936.16,-1104.51 cw(c1914.82,-1125.85) 1945,-1125.85 cw(c1975.18,-1125.85) R16.1@1953.84,-1104.51 ; C17.1@1937.5,-1380.67 cw(c1926.25,-1395.67) 1945,-1395.67 ; R16.1@1945,-1090.67 C9.2@1945,-1180.67 R20.1@1945,-1275.67 C17.1@1945,-1365.67 1945,-1395.67 ; C17.1@1952.5,-1380.67 ccw(c1963.75,-1395.67) 1945,-1395.67 ; 1910,-1430.67 1945,-1395.67
  Bottom Layer w15: S8.3@1145.77,-1139.17 ccw(c1118.24,-1166.69) 1118.24,-1127.77 ccw(c1118.24,-1088.85) S8.3@1145.77,-1116.37 ; S8.3@1157.17,-1127.77 1117.9,-1127.77 1085,-1160.67 v1(1085,-1600.67) 1085,-2045.31 1125.36,-2085.67 1862.5,-2085.67 1900,-2048.17 R37.2@1900,-2008.17 1872.5,-2008.17 ; C22.1@1792.63,-1873.04 cw(c1762.75,-1902.92) 1805,-1902.92 cw(c1847.25,-1902.92) C22.1@1817.37,-1873.04 ; C22.1@1805,-1860.67 1805,-1910.67 1815,-1920.67 1852.5,-1920.67 1857.5,-1925.67 1857.5,-1993.17 ; 1871.36,-2007.03 ccw(c1885.96,-1992.43) R37.2@1896.24,-2010.34 ; R37.2@1884.39,-2014.77 ccw(c1872.5,-2022.17) 1872.5,-2008.17 ; R37.2@1884.39,-2001.57 cw(c1872.5,-1994.17) 1872.5,-2008.17 ; R37.2@1888.78,-1997.33 cw(c1875.86,-1974.82) 1857.5,-1993.17 ; R37.2@1891.16,-2017.01 cw(c1869.82,-2038.35) 1900,-2038.35 cw(c1930.18,-2038.35) R37.2@1908.84,-2017.01 ; 1857.5,-1993.17 1872.5,-2008.17
0~10V(4): C10.2 C18.1 C23.1 R18.1 R21.1 R38.2 S5.3 S5.6 | length 2765.9
  Top Layer w15: S5.6@980,-1373.19 S5.3@1157.17,-1373.19 1220,-1373.19 1237.48,-1355.71 1237.48,-1128.19 1245,-1120.67 C18.1@1315,-1120.67 R21.1@1315,-1030.67 C10.2@1315,-940.67 R18.1@1315,-850.67 ; S5.6@991.4,-1384.59 cw(c1018.92,-1412.11) 1018.92,-1373.19 cw(c1018.92,-1334.27) S5.6@991.4,-1361.79 ; S5.3@1145.77,-1384.59 ccw(c1118.24,-1412.11) 1118.24,-1373.19 ccw(c1118.24,-1334.27) S5.3@1145.77,-1361.79 ; S5.3@1168.57,-1384.59 cw(c1196.09,-1412.11) 1196.09,-1373.19 cw(c1196.09,-1334.27) S5.3@1168.57,-1361.79 ; C18.1@1306.16,-1129.51 ccw(c1284.82,-1150.85) 1284.82,-1120.67 ccw(c1284.82,-1090.49) C18.1@1306.16,-1111.83 ; C18.1@1306.16,-1106.83 ccw(c1284.82,-1085.49) 1315,-1085.49 ccw(c1345.18,-1085.49) C18.1@1323.84,-1106.83 ; R21.1@1306.16,-1044.51 cw(c1284.82,-1065.85) 1315,-1065.85 cw(c1345.18,-1065.85) R21.1@1323.84,-1044.51 ; R21.1@1306.16,-1016.83 ccw(c1284.82,-995.49) 1315,-995.49 ccw(c1345.18,-995.49) R21.1@1323.84,-1016.83 ; C10.2@1306.16,-954.51 cw(c1284.82,-975.85) 1315,-975.85 cw(c1345.18,-975.85) C10.2@1323.84,-954.51 ; C10.2@1306.16,-926.83 ccw(c1284.82,-905.49) 1315,-905.49 ccw(c1345.18,-905.49) C10.2@1323.84,-926.83 ; R18.1@1306.16,-864.51 cw(c1284.82,-885.85) 1315,-885.85 cw(c1345.18,-885.85) R18.1@1323.84,-864.51
  Bottom Layer w15: S5.3@1141.04,-1373.19 cw(c1102.12,-1373.19) 1129.64,-1400.71 cw(c1157.17,-1428.23) S5.3@1157.17,-1389.31 ; S5.3@1157.17,-1373.19 1115,-1415.36 1115,-2020.67 1155,-2060.67 1360,-2060.67 1380,-2040.67 R38.2@1380,-2008.17 1357.5,-2008.17 1345,-1995.67 ; C23.1@1272.63,-1873.04 cw(c1242.75,-1902.92) 1285,-1902.92 cw(c1327.25,-1902.92) C23.1@1297.37,-1873.04 ; C23.1@1285,-1860.67 1285,-1930.67 1295,-1940.67 1330,-1940.67 1345,-1955.67 1345,-1995.67 ; R38.2@1367.97,-1997.84 cw(c1357.79,-1982.88) 1345,-1995.67 ; R38.2@1371.16,-2017.01 cw(c1349.82,-2038.35) 1380,-2038.35 cw(c1410.18,-2038.35) R38.2@1388.84,-2017.01
5V: C30.2 C32.2 C34.2 C35.1 C36.1 C37.1 P8.1 P8.2 P8.3 P11.8 P12.7 P13.3 P13.4 P14.3 P14.4 R32.2 R33.2 R34.2 R35.2 R59.2 R66.2 R69.2 R100.1 R101.1 U8.5 U8.17 U8.27 U8.38 U9.8 | length 15267.4
  Top Layer w15: C34.2@1825,-3305.67 1837.5,-3293.17 1954.5,-3293.17 U8.38@1956,-3294.67 2026,-3294.67 2030,-3290.67 ; C34.2@1833.84,-3309.51 cw(c1873.28,-3348.95) 1873.28,-3293.17 ; 2030,-3309.67 2015,-3294.67 2030,-3279.67 ; 2155,-3480.67 2170,-3495.67 2185,-3480.67 ; R59.2@2158.66,-3691.83 ccw(c2131.29,-3664.46) 2170,-3664.46 ; R59.2@2167.5,-3705.67 2170,-3703.17 U8.5@2170,-3570.67 2170,-3480.67 ; 2170,-3676.53 ccw(c2191.64,-3676.53) R59.2@2176.34,-3691.83 ; C35.1@2221.16,-2972.01 cw(c2194.99,-2998.18) 2232,-2998.18 ; C35.1@2230,-2963.17 2232,-2965.17 U8.27@2232,-3080.67 2232,-3145.67 2222,-3155.67 2060,-3155.67 2030,-3185.67 2030,-3290.67 ; 2232,-2988.52 cw(c2255.35,-2988.52) C35.1@2238.84,-2972.01 ; 2379.25,-3336.42 cw(c2404,-3361.18) U8.17@2404,-3326.17 ; 2575.68,-3325.67 ccw(c2575.68,-3261.35) C32.2@2621.16,-3306.83 ; C32.2@2611.89,-3325.67 ccw(c2611.89,-3297.56) C32.2@2631.77,-3317.44 ; C32.2@2621.16,-3296.83 ccw(c2599.82,-3275.49) 2630,-3275.49 ccw(c2660.18,-3275.49) C32.2@2638.84,-3296.83 ; C32.2@2630,-3310.67 2630,-3255.67 2645,-3240.67 2695,-3240.67 2715,-3220.67 ; C32.2@2635,-3310.67 2620,-3325.67 U8.17@2446,-3325.67 2390,-3325.67 2370,-3345.67 2370,-3455.67 2345,-3480.67 2170,-3480.67 ; 2701.49,-3193.07 cw(c2680.05,-3220.67) 2715,-3220.67 ; 2715,-3175.67 2715,-3220.67 ; 2728.51,-3193.07 ccw(c2749.95,-3220.67) 2715,-3220.67 ; 2030,-3290.67 2030,-3465.67 2045,-3480.67 2170,-3480.67
  Top Layer w30: v3(515,-2035.67) 1110,-2035.67 1180,-2105.67 1180,-2455.67 1240,-2515.67 1550,-2515.67 1620,-2445.67 v3@1620,-2400.67 ; v1(919,-111.67) v1(2158,-111.67) v1(2476,-111.67) ; v1(1995,-2880.67) 1997.5,-2883.17 R66.2@2040,-2883.17 ; 2132.75,-4113.17 cw(c2132.75,-4167.92) R100.1@2171.46,-4129.21 ; R59.2@2167.5,-3705.67 C30.2@2167.5,-3790.67 2167.5,-3953.17 C36.1@2185,-3970.67 2175,-3980.67 2175,-4100.67 ; R101.1@2175,-4215.67 R100.1@2175,-4130.67 2175,-4100.67 ; 2175,-4053.65 cw(c2267.98,-4053.65) C36.1@2202.23,-3987.9 ; 2324.73,-4555.4 ccw(c2299.93,-4530.6) 2335,-4530.6 ccw(c2370.07,-4530.6) 2345.27,-4555.4 ccw(c2370.07,-4530.6) 2370.07,-4565.67 ccw(c2370.07,-4600.74) 2345.27,-4575.94 ; P8.1@2559.73,-4205.94 cw(c2534.93,-4230.74) 2570,-4230.74 cw(c2605.07,-4230.74) 2580.27,-4205.94 cw(c2605.07,-4230.74) 2605.07,-4195.67 cw(c2605.07,-4160.6) P8.1@2580.27,-4185.4 ; P8.2@2659.73,-4205.94 ccw(c2634.93,-4230.74) 2634.93,-4195.67 ccw(c2634.93,-4160.6) P8.2@2659.73,-4185.4 ; P8.2@2680.27,-4205.94 cw(c2705.07,-4230.74) 2705.07,-4195.67 cw(c2705.07,-4160.6) P8.2@2680.27,-4185.4 ; P8.3@2759.73,-4205.94 ccw(c2734.93,-4230.74) 2734.93,-4195.67 ccw(c2734.93,-4160.6) P8.3@2759.73,-4185.4 ; P8.3@2770,-4195.67 P8.2@2670,-4195.67 P8.1@2570,-4195.67 2570,-4275.67 2515,-4330.67 2515,-4540.67 2490,-4565.67 2335,-4565.67 2335,-4480.67 2290,-4435.67 2050,-4435.67 2020,-4405.67 2020,-4140.67 2047.5,-4113.17 2162.5,-4113.17 2175,-4100.67
  Bottom Layer w15: R69.2@2540,-1135.67 2590,-1085.67 2590,-740.67 2595,-735.67 ; R69.2@2545,-1123.17 ccw(c2545,-1105.06) R69.2@2557.8,-1117.87 ; R69.2@2557.5,-1135.67 cw(c2599.75,-1135.67) 2569.87,-1105.8
  Bottom Layer w30: v3(515,-2035.67) 515,-160.67 564,-111.67 v1(919,-111.67) P13.4@919,-431.67 P13.3@919,-531.67 ; P13.3@907.34,-520.01 ccw(c879.18,-491.85) 919,-491.85 ccw(c958.82,-491.85) P13.3@930.66,-520.01 ; P13.4@907.34,-443.33 cw(c879.18,-471.49) 919,-471.49 cw(c958.82,-471.49) P13.4@930.66,-443.33 ; P13.4@907.34,-420.01 ccw(c879.18,-391.85) 919,-391.85 ccw(c958.82,-391.85) P13.4@930.66,-420.01 ; v3(1620,-2395.67) 1865,-2395.67 1918.54,-2449.21 R34.2@1918.54,-2549.58 R33.2@1918.54,-2649.58 R32.2@1918.54,-2749.58 R35.2@1918.54,-2844.58 1918.54,-2880.67 v1(1995,-2880.67) ; R35.2@1899.24,-2865.47 ccw(c1931.44,-2838.97) 1931.44,-2880.67 ; R35.2@1922.4,-2846.4 ccw(c1995,-2786.64) v1(1995,-2880.67) ; P14.3@2146.34,-519.01 ccw(c2118.18,-490.85) 2158,-490.85 ccw(c2197.82,-490.85) P14.3@2169.66,-519.01 ; P14.4@2146.34,-442.33 cw(c2118.18,-470.49) 2158,-470.49 cw(c2197.82,-470.49) P14.4@2169.66,-442.33 ; P14.4@2146.34,-419.01 ccw(c2118.18,-390.85) 2158,-390.85 ccw(c2197.82,-390.85) P14.4@2169.66,-419.01 ; P14.3@2158,-530.67 P14.4@2158,-430.67 v1(2158,-111.67) ; v1(2476,-111.67) 2476,-536.67 2510,-570.67 2556.63,-570.67 2598.6,-612.63 2600,-612.63 2615,-627.63 2615,-715.67 2595,-735.67 ; U9.8@2485,-810.67 2540,-755.67 C37.1@2540,-735.67 2585,-735.67 ; 2508.79,-786.88 ccw(c2457.57,-735.67) C37.1@2530,-735.67 ; U9.8@2510,-810.67 cw(c2570.36,-810.67) 2527.68,-767.99 ; 2704.73,-3185.94 ccw(c2679.93,-3210.74) 2679.93,-3175.67 ccw(c2679.93,-3140.6) 2704.73,-3165.4 ; 2715,-3175.67 2650,-3175.67 2624,-3149.67 2624,-2914.67 2590,-2880.67 v1(1995,-2880.67)
12V: C13.2 C14.2 C15.1 C16.1 D1.1 D2.1 D3.1 P13.1 P13.2 P14.1 P14.2 R40.2 R41.2 R42.2 R43.2 R44.2 R45.2 R46.2 R47.2 RL1.1 RL2.1 RL3.1 S1.6 S2.6 S3.6 S4.6 U1.9 U2.8 U3.8 U4.8 U5.8 U6.8 U7.8 | length 19845.4
  Top Layer w30: v3(440,-2090.67) 1105,-2090.67 1140,-2125.67 1140,-2810.67 1120,-2830.67 1120,-3190.67 ; S4.6@993.58,-4499.41 993.58,-4545.42 1003.83,-4555.67 1110,-4555.67 1410,-4555.67 ; v1(1019,-59.67) v1(2258,-59.67) ; 1141.6,-3219.07 cw(c1166.98,-3244.46) RL3.1@1191.91,-3218.62 ; 1142.11,-3693.56 cw(c1167.5,-3718.94) RL2.1@1191.81,-3692.53 ; RL1.1@1163.63,-4170.67 ccw(c1104.8,-4170.67) 1146.4,-4129.07 ccw(c1188,-4087.47) RL1.1@1188,-4146.3 ; RL3.1@1168.8,-3237.68 ccw(c1138,-3261.77) 1138,-3222.67 ; RL3.1@1168.8,-3207.66 cw(c1138,-3183.57) 1138,-3222.67 ; RL2.1@1169.27,-3712.26 ccw(c1136,-3739.96) 1136,-3696.67 ; RL2.1@1169.27,-3681.08 cw(c1136,-3653.38) 1136,-3696.67 ; RL3.1@1171.08,-3240.21 ccw(c1145.77,-3266.44) 1120,-3240.67 ; RL2.1@1171.5,-3714.6 ccw(c1146.31,-3741.97) 1120,-3715.67 ; RL3.1@1177.57,-3200.65 cw(c1155.86,-3154.81) 1120,-3190.67 ; RL1.1@1205.23,-4187.9 cw(c1246.83,-4229.5) 1246.83,-4170.67 cw(c1246.83,-4111.84) RL1.1@1205.23,-4153.44 ; RL2.1@1205.23,-3713.9 cw(c1249.25,-3757.92) 1249.25,-3695.67 ; RL2.1@1205.23,-3679.44 ccw(c1244.42,-3640.25) 1244.42,-3695.67 ; RL3.1@1205.23,-3239.9 cw(c1251.66,-3286.33) 1251.66,-3220.67 ; RL3.1@1205.23,-3205.44 ccw(c1242.01,-3168.66) 1242.01,-3220.67 ; 1230,-4555.67 1410,-4555.67 ; 1240.25,-4545.42 S1.6@1240.25,-4499.41 ; D2.1@1310,-3695.67 1189,-3695.67 RL2.1@1188,-3696.67 1139,-3696.67 ; D3.1@1310,-3220.67 1190,-3220.67 RL3.1@1188,-3222.67 RL3.1@1152,-3222.67 ; 1455.81,-4553.69 ccw(c1401.53,-4499.41) S2.6@1478.29,-4499.41 ; U1.9@1470,-3520.67 1518.58,-3520.67 1543.58,-3545.67 1543.58,-4170.67 ; S2.6@1486.92,-4499.41 S2.6@1486.92,-4522.59 ; 1495,-4170.67 1537.43,-4128.24 ; U1.9@1495,-3520.67 cw(c1495,-3577.6) 1535.26,-3537.35 ; S2.6@1495.54,-4499.41 ccw(c1572.3,-4499.41) 1518.02,-4553.69 ; C15.1@1502.77,-1367.9 ccw(c1461.17,-1409.5) 1461.17,-1350.67 ccw(c1461.17,-1291.84) C15.1@1502.77,-1333.44 ; C15.1@1520,-1350.67 1420,-1350.67 1400,-1330.67 C13.2@1400,-1210.67 1505,-1210.67 1530,-1185.67 U2.8@1530,-1145.67 ; 1543.58,-4120.67 1586.01,-4163.1 ; v3(1770,-1660.67) 1775,-1665.67 v3(2290,-1665.67) 2610,-1665.67 v3(2635,-1690.67) ; v3@1771.77,-1658.9 ccw(c1788.11,-1642.56) 1788.11,-1665.67 ; C14.2@2120,-1205.67 ccw(c2216.57,-1205.67) 2148.28,-1273.95 ; C16.1@2190.63,-1340.67 ccw(c2131.8,-1340.67) 2173.4,-1299.07 ccw(c2215,-1257.47) C16.1@2215,-1316.3 ; C16.1@2215,-1340.67 2115,-1240.67 C14.2@2115,-1200.67 2220,-1200.67 2255,-1165.67 U3.8@2255,-1135.67 ; v3@2645,-1680.67 2680,-1645.67 2680,-1590.67 2653.2,-1563.87 v3(2653.2,-1502.83) ; 1120,-3715.67 1139,-3696.67 ; 1120,-3715.67 1120,-4102.67 RL1.1@1188,-4170.67 D1.1@1310,-4170.67 1543.58,-4170.67 ; 1120,-3240.67 1138,-3222.67 ; 1120,-3240.67 1120,-3680.67 1136,-3696.67 ; 1120,-3190.67 RL3.1@1152,-3222.67 ; 1136,-3696.67 1139,-3696.67 ; 1138,-3222.67 RL3.1@1152,-3222.67 ; 1139,-3696.67 cw(c1139,-3733.74) 1168.57,-3711.37 ccw(c1139,-3733.74) 1139,-3696.67 ; 1139,-3696.67 ccw(c1139,-3659.6) 1168.57,-3681.97 cw(c1139,-3659.6) 1139,-3696.67 ; 1410,-4555.67 1497.16,-4555.67 1486.92,-4545.42 1476.67,-4555.67 1453.83,-4555.67 S2.6@1486.92,-4522.59 ; 1410,-4555.67 1520,-4555.67 ; S2.6@1486.92,-4522.59 1520,-4555.67 ; 1520,-4555.67 1723.33,-4555.67 1733.58,-4545.42 S3.6@1733.58,-4499.41 1655,-4420.83 1655,-4175.67 1650,-4170.67 1543.58,-4170.67
  Bottom Layer w15: v3@2627.93,-1697.74 cw(c2610.86,-1714.81) 2635,-1714.81 cw(c2659.14,-1714.81) v3@2642.07,-1697.74 ; U7.8@2635,-1755.59 v3(2635,-1690.67) ; v3@2635,-1706.55 ccw(c2656.83,-1706.55) U7.8@2641.39,-1721.99 ; 2636.08,-1710.59 cw(c2646.28,-1707.86) v3@2640.49,-1699.03 ; U7.8@2638.21,-1753.17 2678.21,-1753.17 R47.2@2723.21,-1798.17 ; 2693.34,-1768.3 cw(c2663.46,-1798.17) R47.2@2705.71,-1798.17 ; R47.2@2705.41,-1780.37 ccw(c2718.21,-1767.56) R47.2@2718.21,-1785.67
  Bottom Layer w30: v3(440,-2090.67) 440,-100.67 481,-59.67 v1(1019,-59.67) P13.2@1019,-431.67 P13.1@1019,-531.67 1196,-531.67 1230,-565.67 1230,-945.67 1300,-1015.67 1300,-1328.17 1322.5,-1350.67 C15.1@1520,-1350.67 ; P13.1@1007.34,-520.01 ccw(c979.18,-491.85) 1019,-491.85 ccw(c1058.82,-491.85) 1030.66,-520.01 ccw(c1058.82,-491.85) 1058.82,-531.67 ccw(c1058.82,-571.49) P13.1@1030.66,-543.33 ; P13.2@1007.34,-443.33 cw(c979.18,-471.49) 1019,-471.49 cw(c1058.82,-471.49) P13.2@1030.66,-443.33 ; P13.2@1007.34,-420.01 ccw(c979.18,-391.85) 1019,-391.85 ccw(c1058.82,-391.85) P13.2@1030.66,-420.01 ; C15.1@1502.77,-1367.9 ccw(c1461.17,-1409.5) 1461.17,-1350.67 ccw(c1461.17,-1291.84) 1502.77,-1333.44 ccw(c1467.2,-1297.87) 1517.5,-1297.87 ; 1517.5,-1285.8 ccw(c1584.87,-1285.8) C15.1@1537.23,-1333.44 ; C15.1@1520,-1375.04 cw(c1520,-1433.87) 1561.6,-1392.27 cw(c1603.2,-1350.67) C15.1@1544.37,-1350.67 ; U6.8@1607,-1747.67 ccw(c1631.14,-1747.67) U6.8@1614.07,-1764.74 ; U6.8@1610,-1800.67 cw(c1610,-1897.24) R45.2@1678.28,-1828.95 ; U6.8@1610,-1775.67 1625,-1775.67 R45.2@1695,-1845.67 ; U6.8@1610,-1770.67 cw(c1610,-1794.81) 1627.07,-1777.74 ; R43.2@1670,-1070.67 R40.2@1517.5,-1070.67 1517.5,-1348.17 C15.1@1520,-1350.67 ; U4.8@1670,-985.67 1677.5,-993.17 R43.2@1677.5,-1070.67 ; U4.8@1672.12,-983.55 cw(c1659.14,-996.53) U4.8@1677.5,-996.53 ; R45.2@1677.93,-1828.6 cw(c1660.86,-1845.67) R45.2@1685,-1845.67 ; R42.2@1695,-1925.67 R45.2@1695,-1845.67 ; R45.2@1705,-1845.67 cw(c1729.14,-1845.67) R45.2@1712.07,-1828.6 ; v3(1770,-1660.67) 1770,-1770.67 R45.2@1695,-1845.67 ; U5.8@2130,-1795.67 cw(c2130,-1910.34) R44.2@2211.09,-1829.26 ; U5.8@2130,-1770.67 2152.5,-1770.67 R44.2@2215,-1833.17 ; U5.8@2130,-1765.67 cw(c2130,-1807.92) 2159.87,-1778.04 ; C16.1@2194.48,-1353.81 cw(c2150.99,-1381.65) 2187.5,-1418.17 ; C16.1@2197.77,-1357.9 cw(c2156.17,-1399.5) 2215,-1399.5 cw(c2273.83,-1399.5) C16.1@2232.23,-1357.9 ; R44.2@2197.93,-1816.1 cw(c2180.86,-1833.17) R44.2@2205,-1833.17 ; 2213.87,-1391.8 ccw(c2183.14,-1361.07) C16.1@2219.74,-1337.63 ; R41.2@2215,-1920.67 R44.2@2215,-1833.17 ; C16.1@2215,-1340.67 2215,-1390.67 ; R44.2@2220,-1828.17 ccw(c2220,-1797.99) 2241.34,-1819.33 ; P14.1@2246.34,-519.01 ccw(c2218.18,-490.85) 2258,-490.85 ccw(c2297.82,-490.85) P14.1@2269.66,-519.01 ; P14.2@2246.34,-442.33 cw(c2218.18,-470.49) 2258,-470.49 cw(c2297.82,-470.49) P14.2@2269.66,-442.33 ; P14.2@2246.34,-419.01 ccw(c2218.18,-390.85) 2258,-390.85 ccw(c2297.82,-390.85) P14.2@2269.66,-419.01 ; P14.1@2258,-530.67 P14.2@2258,-430.67 v1(2258,-59.67) ; v3(2290,-1665.67) 2290,-1770.67 2227.5,-1833.17 R44.2@2215,-1833.17 ; v3(2653.2,-1502.83) 2598.12,-1502.83 2585.96,-1490.67 2255,-1490.67 2215,-1450.67 2215,-1390.67 ; R46.2@2723.21,-1880.67 R47.2@2723.21,-1798.17 ; C15.1@1520,-1350.67 1587.5,-1418.17 2187.5,-1418.17 ; 2187.5,-1418.17 2215,-1390.67 ; 2215,-1390.67 ccw(c2175.9,-1390.67) 2199.99,-1359.87 cw(c2175.9,-1390.67) 2215,-1390.67 ; 2215,-1390.67 cw(c2254.1,-1390.67) 2230.01,-1359.87 ccw(c2254.1,-1390.67) 2215,-1390.67
485A: F6.1 P13.8 P14.8 | length 3660.4
  Top Layer w10: v1(719,-200.67) v1(1958,-200.67) v1(2345,-200.67) ; v1@724.3,-205.97 cw(c737.11,-218.78) 737.11,-200.67 cw(c737.11,-182.56) v1@724.3,-195.37 ; v1@1952.7,-205.97 ccw(c1939.89,-218.78) 1939.89,-200.67 ccw(c1939.89,-182.56) v1@1952.7,-195.37 ; v1@1963.3,-205.97 cw(c1976.11,-218.78) 1976.11,-200.67 cw(c1976.11,-182.56) v1@1963.3,-195.37 ; v1@2339.7,-205.97 ccw(c2326.89,-218.78) 2326.89,-200.67 ccw(c2326.89,-182.56) v1@2339.7,-195.37
  Bottom Layer w10: P13.8@700.26,-412.93 ccw(c655.03,-367.7) 719,-367.7 ccw(c782.97,-367.7) P13.8@737.74,-412.93 ; P13.8@707.34,-420.01 ccw(c679.18,-391.85) 719,-391.85 ccw(c758.82,-391.85) P13.8@730.66,-420.01 ; v1@713.7,-205.97 cw(c700.89,-218.78) 719,-218.78 cw(c737.11,-218.78) v1@724.3,-205.97 ; P13.8@719,-431.67 v1(719,-200.67) ; P14.8@1939.26,-411.93 ccw(c1894.03,-366.7) 1958,-366.7 ccw(c2021.97,-366.7) P14.8@1976.74,-411.93 ; P14.8@1946.34,-419.01 ccw(c1918.18,-390.85) 1958,-390.85 ccw(c1997.82,-390.85) P14.8@1969.66,-419.01 ; v1@1952.7,-205.97 cw(c1939.89,-218.78) 1958,-218.78 cw(c1976.11,-218.78) v1@1963.3,-205.97 ; P14.8@1958,-430.67 v1(1958,-200.67) ; F6.1@2135.26,-693.61 cw(c2154.07,-684.2) F6.1@2139.2,-669.33 ; F6.1@2144.2,-689.14 cw(c2167.15,-677.66) F6.1@2149,-659.52 ; F6.1@2153.15,-684.66 cw(c2180.22,-671.12) F6.1@2158.81,-649.71 ; F6.1@2162.09,-680.19 cw(c2193.29,-664.58) 2168.62,-639.9 ; F6.1@2171.03,-675.72 cw(c2206.37,-658.04) 2178.43,-630.1 ; F6.1@2179.97,-671.24 cw(c2219.44,-651.49) 2188.24,-620.29 ; F6.1@2188.92,-666.77 cw(c2232.52,-644.95) 2198.04,-610.48 ; F6.1@2192.9,-670.62 F6.1@2137.9,-670.62 2207.85,-600.67 ; F6.1@2197.86,-662.29 cw(c2245.59,-638.41) 2207.85,-600.67 ; v1@2339.7,-205.97 cw(c2326.89,-218.78) 2345,-218.78 cw(c2363.11,-218.78) v1@2350.3,-205.97 ; v1(2345,-200.67) 2345,-575.67 2320,-600.67 2207.85,-600.67
485B: F5.1 P13.7 P14.7 | length 4068.9
  Top Layer w10: v1(772.5,-163.17) v1(2010,-163.17) v1@2375,-163.17 ; v1@777.81,-168.47 cw(c790.61,-181.27) 790.61,-163.17 cw(c790.61,-145.06) v1@777.81,-157.86 ; v1@2004.7,-168.47 ccw(c1991.89,-181.27) 1991.89,-163.17 ccw(c1991.89,-145.06) v1@2004.7,-157.86 ; v1@2015.3,-168.47 cw(c2028.11,-181.27) 2028.11,-163.17 cw(c2028.11,-145.06) v1@2015.3,-157.86 ; 2350.85,-163.17 cw(c2350.85,-189.82) v1@2369.7,-170.97
  Bottom Layer w10: P13.7@719,-531.67 772.5,-478.17 v1(772.5,-163.17) ; P13.7@719,-515.17 ccw(c719,-475.35) 747.16,-503.51 ccw(c775.32,-531.67) P13.7@735.5,-531.67 ; P13.7@719,-505.17 ccw(c719,-441.21) 764.23,-486.44 ccw(c809.46,-531.67) P13.7@745.5,-531.67 ; v1@767.2,-168.47 cw(c754.4,-181.27) 772.5,-181.27 cw(c790.61,-181.27) v1@777.81,-168.47 ; P14.7@1958,-530.67 2010,-478.67 ; P14.7@1958,-514.17 ccw(c1958,-474.35) 1986.16,-502.51 ccw(c2014.32,-530.67) P14.7@1974.5,-530.67 ; P14.7@1958,-504.17 ccw(c1958,-440.21) 2003.23,-485.44 ccw(c2048.46,-530.67) P14.7@1984.5,-530.67 ; v1(2010,-163.17) 2010,-478.67 ; 2011.5,-184.9 ccw(c1988.26,-184.9) 2004.7,-168.47 cw(c1991.89,-181.27) 2010,-181.27 cw(c2028.11,-181.27) 2015.3,-168.47 ccw(c2024.48,-177.64) 2011.5,-177.64 ; v1@2011.5,-166.66 2011.5,-477.17 2010,-478.67 ; F5.1@2312.9,-670.62 2375,-608.52 ; F5.1@2330.97,-689.27 cw(c2355.49,-671.15) F5.1@2333.93,-649.59 ; F5.1@2339.01,-683.33 cw(c2364.94,-664.17) 2342.15,-641.38 ; F5.1@2347.06,-677.38 cw(c2374.39,-657.19) 2350.36,-633.16 ; F5.1@2355.1,-671.44 cw(c2383.84,-650.21) 2358.57,-624.95 ; F5.1@2363.14,-665.5 cw(c2393.28,-643.24) 2366.79,-616.74 ; v1@2369.7,-170.97 cw(c2356.89,-183.78) 2375,-183.78 cw(c2393.11,-183.78) v1@2380.3,-170.97 ; F5.1@2371.19,-659.56 cw(c2402.73,-636.26) 2375,-608.53 ; v1(2375,-165.67) 2375,-608.52
ADC1: C26.1 DW2.K S10.4 U8.34 | length 2570.4
  Top Layer w15: U8.34@1956,-3168.67 1668,-3168.67 1635,-3135.67 1635,-2715.67 1660,-2690.67 2590,-2690.67 2615,-2665.67 C26.1@2615,-2510.67 2620,-2505.67 2685,-2505.67 2700,-2490.67 DW2.K@2700,-2435.67 2750,-2385.67 2750,-2299.43 2705,-2254.43 S10.4@2705,-2251.93 ; C26.1@2606.16,-2524.51 cw(c2584.82,-2545.85) 2615,-2545.85 cw(c2645.18,-2545.85) C26.1@2623.84,-2524.51 ; C26.1@2623.84,-2514.51 cw(c2645.18,-2535.85) 2645.18,-2505.67 cw(c2645.18,-2475.49) C26.1@2623.84,-2496.83 ; DW2.K@2687.63,-2448.04 cw(c2657.75,-2477.92) 2700,-2477.92 cw(c2742.25,-2477.92) DW2.K@2712.37,-2448.04 ; DW2.K@2705,-2418.17 ccw(c2705,-2387.99) 2726.34,-2409.33 ; S10.4@2705,-2268.05 cw(c2705,-2300.94) 2728.25,-2277.68 ; S10.4@2721.12,-2251.93 ccw(c2766.08,-2251.93) 2734.29,-2283.72 ; DW2.K@2722.5,-2435.67 cw(c2776.82,-2435.67) 2738.41,-2397.26
ADC2: C25.1 DW1.K S9.4 U8.35 | length 2379
  Top Layer w15: U8.35@1956,-3199.67 1649,-3199.67 1610,-3160.67 1610,-2690.67 1635,-2665.67 2305,-2665.67 2340,-2630.67 C25.1@2340,-2510.67 2420,-2510.67 2435,-2495.67 DW1.K@2435,-2435.67 2480,-2390.67 2480,-2299.54 S9.4@2432.39,-2251.93 ; C25.1@2331.16,-2524.51 cw(c2309.82,-2545.85) 2340,-2545.85 cw(c2370.18,-2545.85) C25.1@2348.84,-2524.51 ; C25.1@2348.84,-2519.51 cw(c2370.18,-2540.85) 2370.18,-2510.67 cw(c2370.18,-2480.49) C25.1@2348.84,-2501.83 ; DW1.K@2422.63,-2448.04 cw(c2392.75,-2477.92) 2435,-2477.92 cw(c2477.25,-2477.92) DW1.K@2447.37,-2448.04 ; S9.4@2432.39,-2268.05 cw(c2432.39,-2306.97) 2459.91,-2279.45 cw(c2487.43,-2251.93) S9.4@2448.51,-2251.93 ; DW1.K@2440,-2418.17 ccw(c2440,-2387.99) 2461.34,-2409.33 ; DW1.K@2457.5,-2435.67 cw(c2511.82,-2435.67) 2473.41,-2397.26
ADC3: C33.1 DW4.K S12.4 U8.36 | length 2201.9
  Top Layer w15: U8.36@1956,-3231.67 1611,-3231.67 1585,-3205.67 1585,-2661.03 1605.36,-2640.67 2045,-2640.67 2065,-2620.67 C33.1@2065,-2510.67 2140,-2510.67 2155,-2495.67 DW4.K@2155,-2435.67 2170,-2435.67 2205,-2400.67 ; C33.1@2056.16,-2524.51 cw(c2034.82,-2545.85) 2065,-2545.85 cw(c2095.18,-2545.85) C33.1@2073.84,-2524.51 ; C33.1@2073.84,-2519.51 cw(c2095.18,-2540.85) 2095.18,-2510.67 cw(c2095.18,-2480.49) C33.1@2073.84,-2501.83 ; DW4.K@2142.63,-2448.04 cw(c2112.75,-2477.92) 2155,-2477.92 cw(c2197.25,-2477.92) DW4.K@2167.37,-2448.04 ; S12.4@2159.78,-2251.93 2171.26,-2251.93 2205,-2285.67 ; S12.4@2160.32,-2268.04 cw(c2162.36,-2328.3) 2205,-2285.67 ; DW4.K@2160.6,-2418.18 ccw(c2162.65,-2358.32) 2205,-2400.67 ; DW4.K@2177.5,-2435.67 cw(c2195.61,-2435.67) DW4.K@2182.8,-2422.87 ; 2205,-2400.67 2205,-2285.67
ADC4: C31.1 DW3.K S11.4 U8.37 | length 1991.2
  Top Layer w15: C31.1@1791.16,-2524.51 cw(c1769.82,-2545.85) 1800,-2545.85 cw(c1830.18,-2545.85) C31.1@1808.84,-2524.51 ; C31.1@1808.84,-2519.51 cw(c1830.18,-2540.85) 1830.18,-2510.67 cw(c1830.18,-2480.49) C31.1@1808.84,-2501.83 ; DW3.K@1877.63,-2448.04 cw(c1847.75,-2477.92) 1890,-2477.92 cw(c1932.25,-2477.92) DW3.K@1902.37,-2448.04 ; S11.4@1887.16,-2268.05 cw(c1887.16,-2306.97) 1914.69,-2279.45 cw(c1942.21,-2251.93) S11.4@1903.29,-2251.93 ; S11.4@1887.16,-2251.93 1930,-2294.77 1930,-2395.67 DW3.K@1890,-2435.67 1890,-2490.67 1870,-2510.67 C31.1@1800,-2510.67 1800,-2585.67 1770,-2615.67 1595,-2615.67 1560,-2650.67 1560,-3230.67 1592,-3262.67 U8.37@1956,-3262.67 ; DW3.K@1895,-2418.17 ccw(c1895,-2387.99) 1916.34,-2409.33 ; DW3.K@1912.5,-2435.67 cw(c1966.82,-2435.67) 1928.41,-2397.26
AI1: F2.1 P6.1 | length 1070.6
  Top Layer w15: P6.1@821.67,-1481.53 cw(c798.87,-1515.2) 839.54,-1515.2 ; P6.1@839.54,-1455.14 839.54,-1515.21 ; P6.1@857.4,-1481.53 ccw(c880.2,-1515.2) 839.54,-1515.2 ; F2.1@1329.11,-1612.07 ccw(c1301.59,-1639.59) 1301.59,-1600.67 ccw(c1301.59,-1561.75) F2.1@1329.11,-1589.27 ; F2.1@1340.51,-1600.67 1300,-1600.67 1280,-1620.67 1280,-1765.67 1265,-1780.67 987.5,-1780.67 967.5,-1760.67 967.5,-1590.67 927.5,-1550.67 875,-1550.67 839.54,-1515.21